# Altium PCB STM32C8T6.PcbDoc
Units mil, origin at the board's own origin, x right, y up, seen from the top; angles counter-clockwise.
Board outline 3865.24 x 3866.42 mil, 2 copper layers (Top Layer, Bottom Layer); 70 components, 62 nets, 378 pads, 47 vias.
Unrouted connection lines stored in the file: 3.
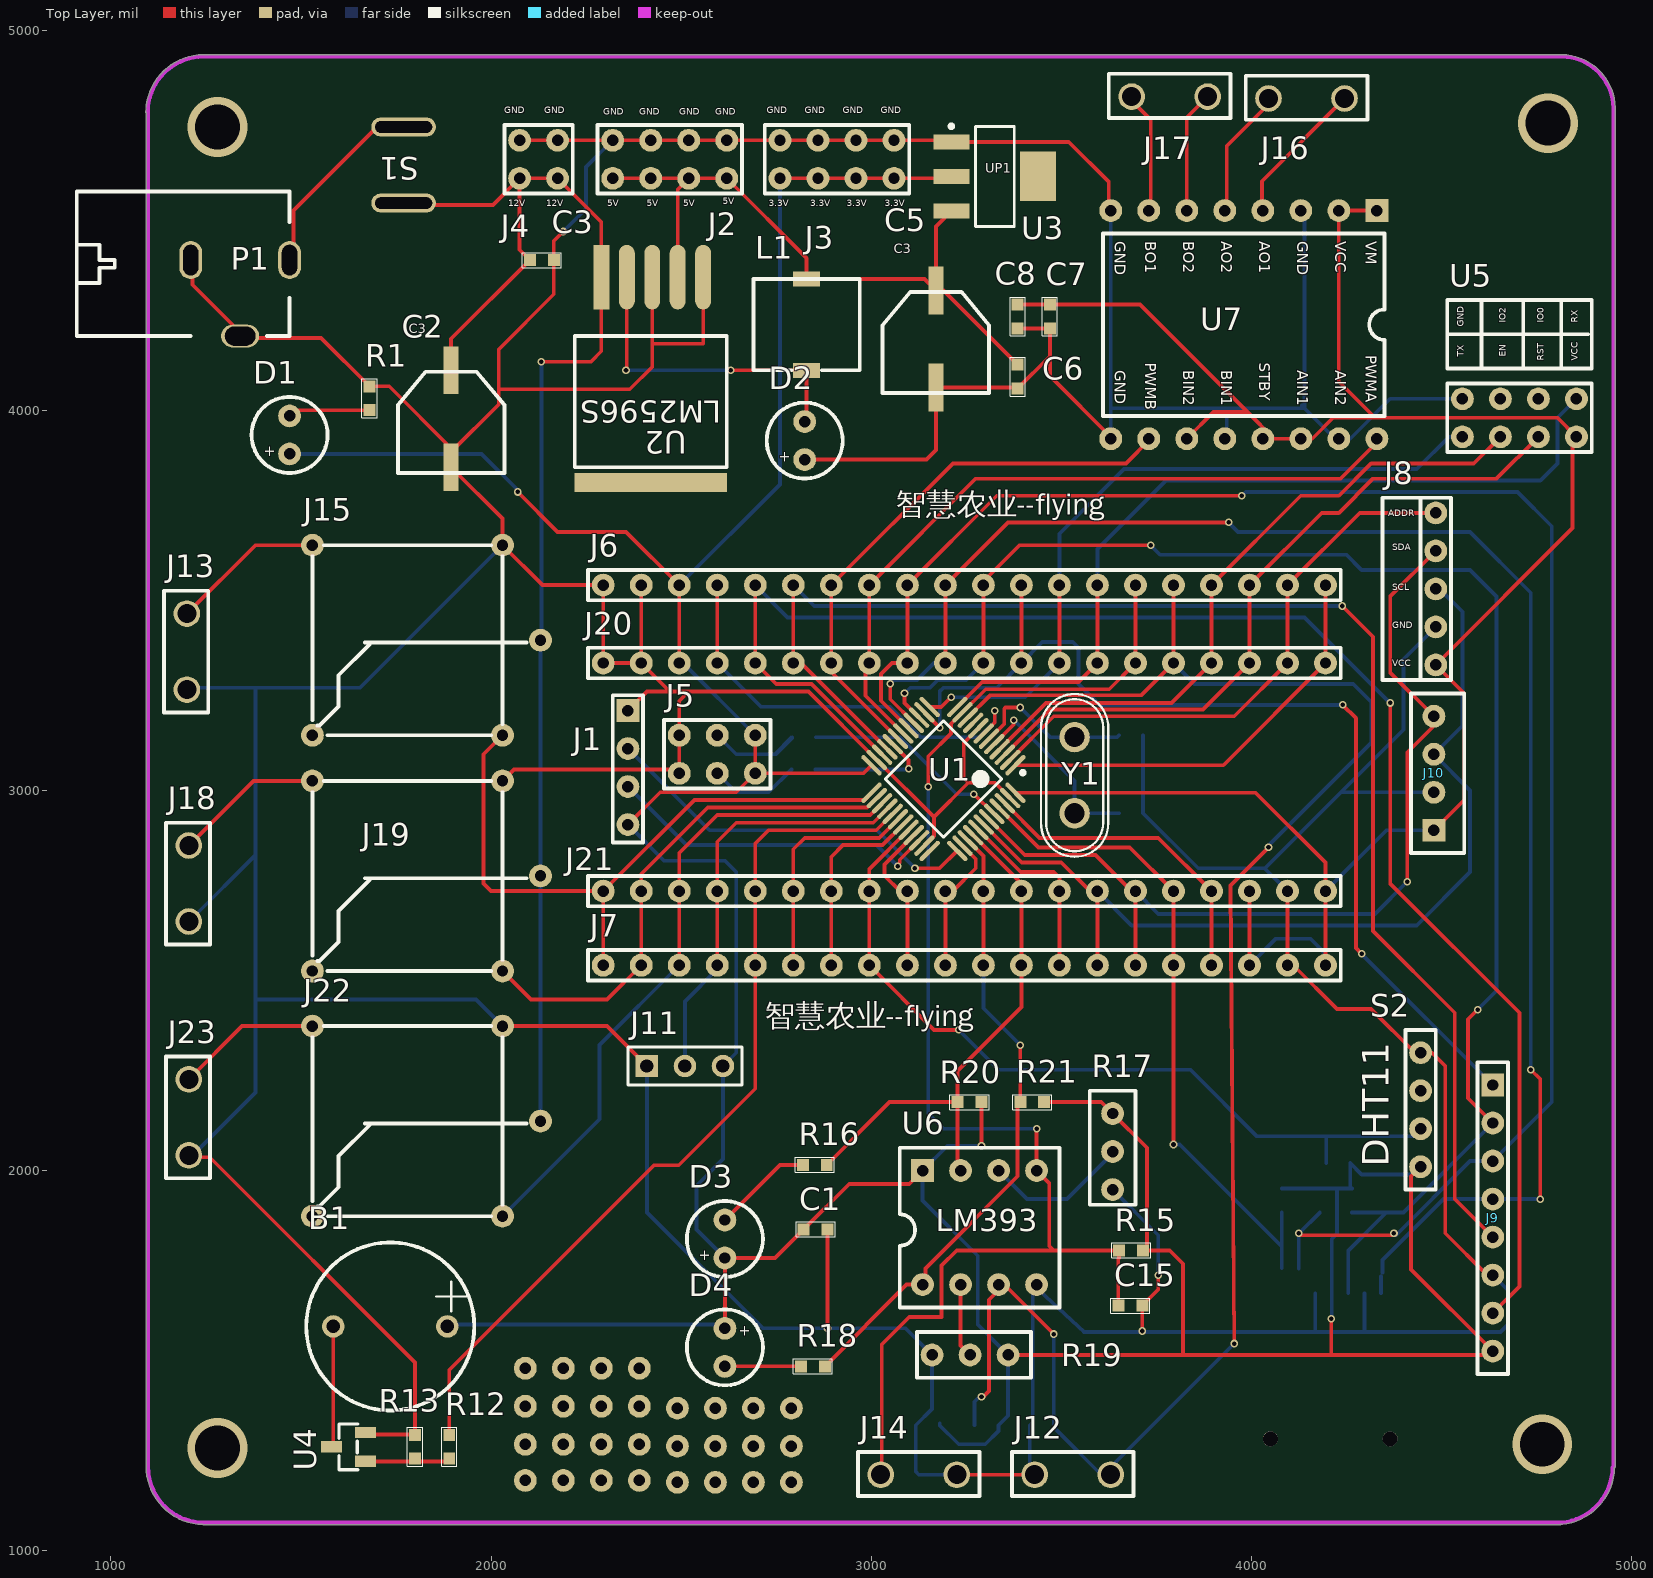
[diagram p0: Top Layer view]
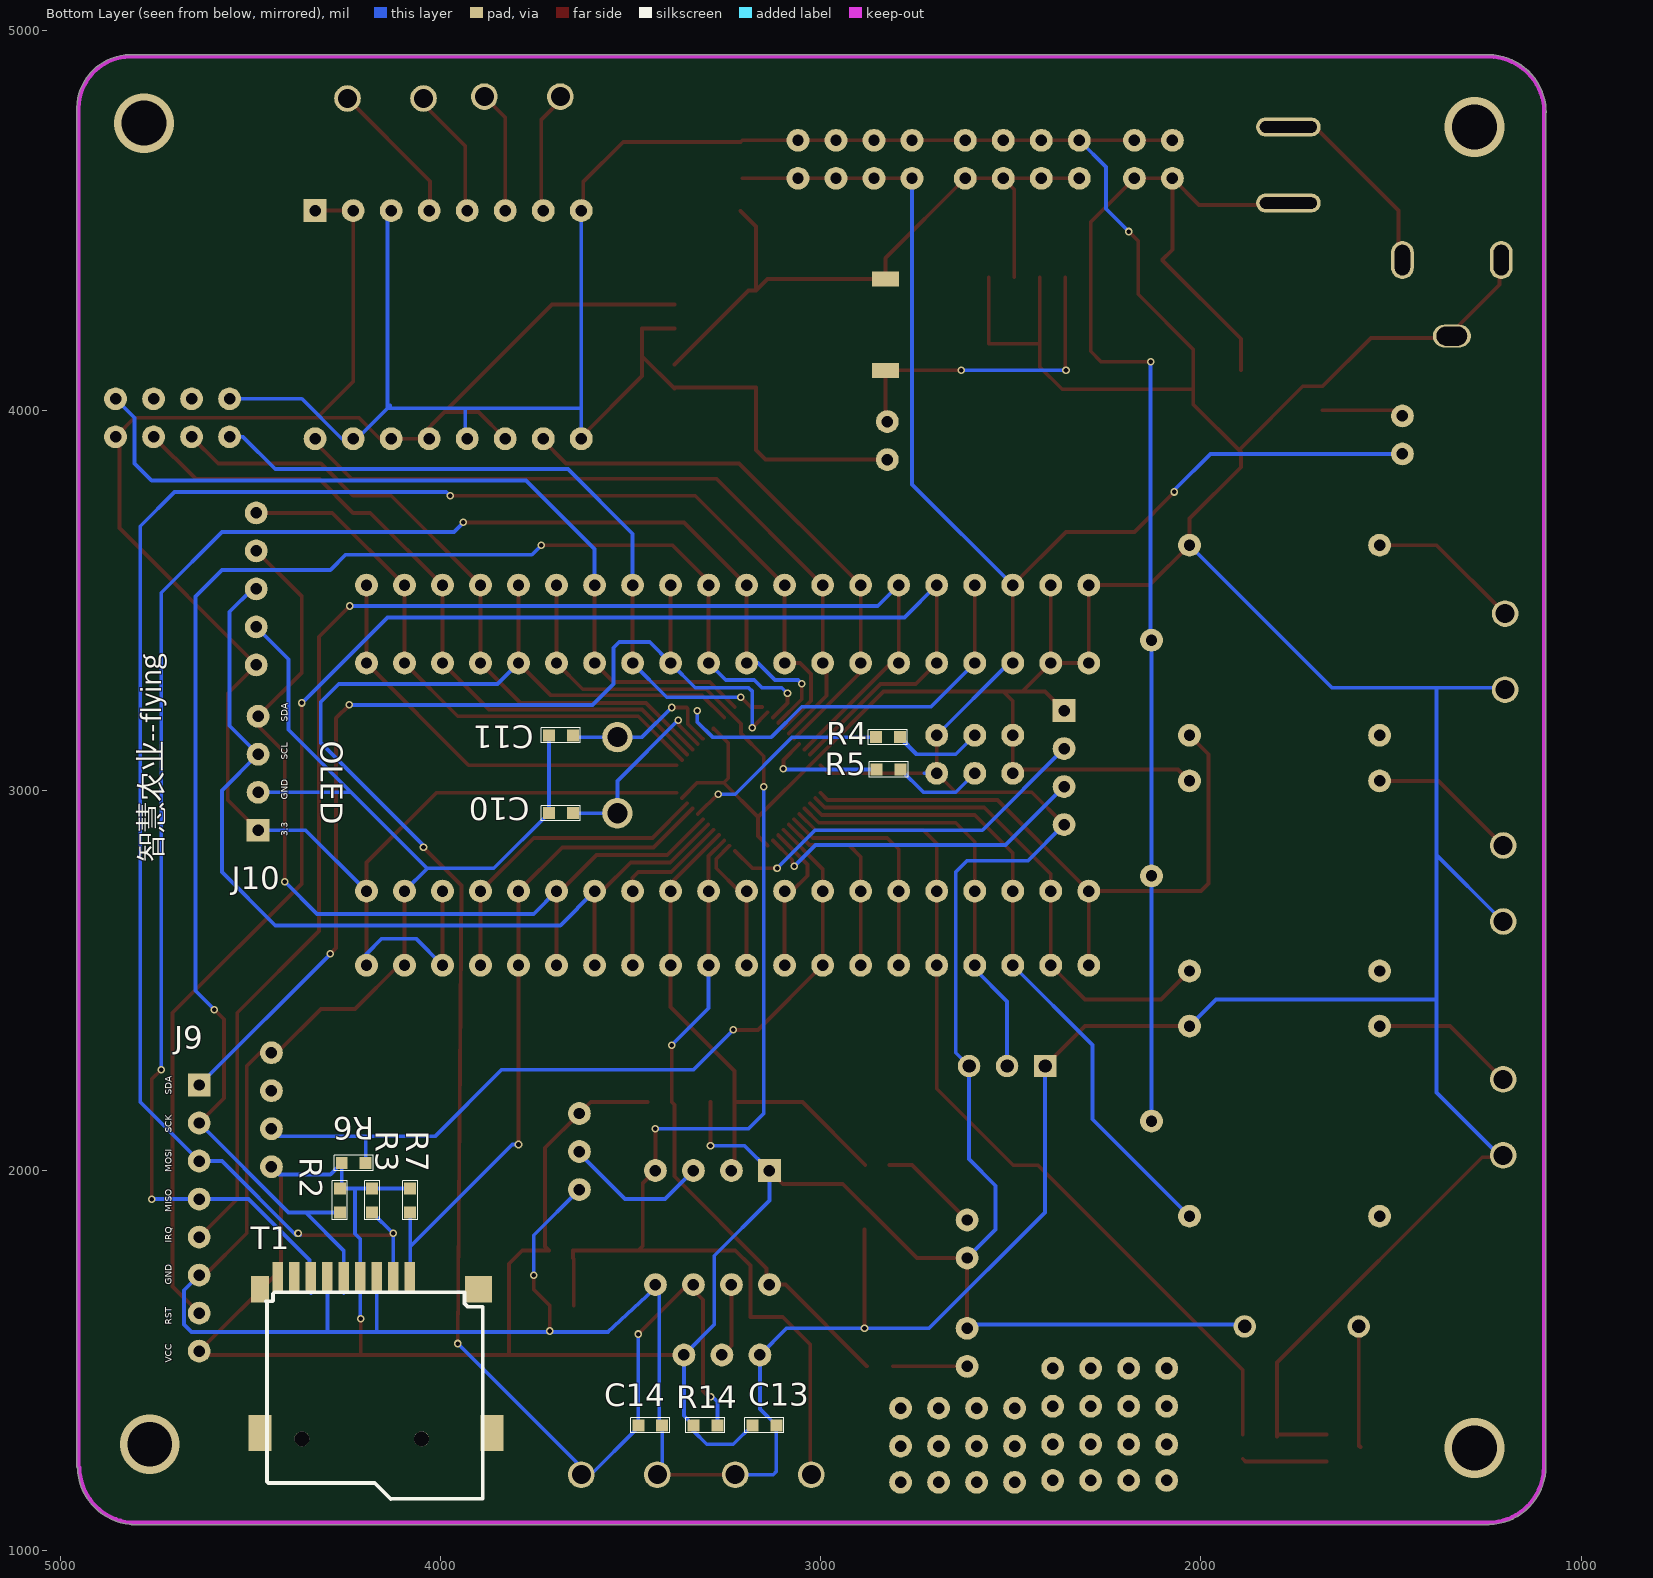
[diagram p1: Bottom Layer view, seen from below]

## Layer stack, top to bottom
Top Solder: solder mask 0.4, Solder Resist, Dk 3.5
Top Layer: signal copper 1.4
Dielectric 1: dielectric 12.6, FR-4, Dk 4.8
Bottom Layer: signal copper 1.4
Bottom Solder: solder mask 0.4, Solder Resist, Dk 3.5

## Board outline
1093.29,1209.33 cw(c1098.09,1210.79) 1093.07,1210.79 1093.07,1212.39 cw(c1245.5,1221.67) 1092.81,1219.39 cw(c1097.82,1219.47) 1093.07,1221.08 1093.07,4781.92 cw(c1097.01,4785.02) 1092,4785.1 cw(c1244.68,4782.52) 1093.07,4800.77 1093.07,4801.91 cw(c1098.09,4801.91) 1093.48,4803.9 cw(c1244.68,4782.52) 1242.41,4935.21 cw(c1242.48,4930.2) 1243.37,4935.13 4814.56,4935.13 cw(c4814.56,4930.12) 4815.76,4934.98 cw(c4816.88,4930.1) 4816.97,4935.11 cw(c4814.56,4792.6) 4957.05,4795.95 cw(c4952.22,4794.6) 4957.24,4794.6 4957.24,1222.21 cw(c4952.22,1222.21) 4954.98,1218.02 cw(c4802.32,1221.48) 4815.96,1069.38 cw(c4814,1074) 4814,1068.98 4810.37,1068.98 cw(c4802.32,1221.48) 4804.59,1068.79 cw(c4804.52,1073.8) 4803.13,1068.98 1242,1068.98 cw(c1242,1074) 1241.42,1069.02 cw(c1245.5,1221.67)

## Design rules (kind name [scope] priority, off if disabled: settings)
Clearance [All] p1: gap=5
DiffPairsRouting [All] p1: maxlimit=5 minlimit=2 mostfreqgap=2 toplayer_minwidth=1 toplayer_maxwidth=5 toplayer_prefwidth=3 bottomlayer_minwidth=1 bottomlayer_maxwidth=5 bottomlayer_prefwidth=3 maxuncoupledlength=500
PolygonConnect [All] p1: connectstyle=Relief reliefconductorwidth=10 reliefentries=4 polygonreliefangle="90 Angle" airgapwidth=10
RoutingVias [All] p1: holewidth=5 width=10 viastyle="Through Hole" minholewidth=3 minwidth=5 maxholewidth=8 maxwidth=15
SolderMaskExpansion [All] p1: expansion=4
Width [All] p1: maxlimit=12 minlimit=5 preferedwidth=10 minimp=50.000000 maximp=50.000000 favimp=50.000000
28 further rules are at their usual default settings.

## Classes and differential pairs
component class Sheet1: B1 C1 C2 C3 C5 C6 C7 C8 C10 C11 D1 D2 J1 J2 J3 J4 J5 J6 J7 J20 J21 L1 P1 R1 R2 R3 R4 R5 R6 R7 R12 R13 S1 S2 T1 U1 U2 U3 U4 Y1
component class Sheet2: C13 C14 C15 D3 D4 J8 J9 J10 J11 J12 J13 J14 J15 J16 J17 J18 J19 J22 J23 R14 R15 R16 R17 R18 R19 R20 R21 U5 U6 U7

## Components (designator, comment, footprint, x,y, rotation, side; value= is the part's Value field where it differs from the comment)
B1 "BEEP" BEEP-9.5X5.5 1785,1590 r180 top
C1 "104" CAP_0603_FIRE 2885,1845 r180 top
C2 "220UF35V" CAP+_47UF_FIRE 1895,3995 r0 top
C3 "0.1UF" CAP_0603_FIRE 2165,4395 r180 top
C5 "220UF35V" CAP+_47UF_FIRE 3170,4205 r0 top
C6 "0.1UF" CAP_0603_FIRE 3385,4120 r270 top
C7 "22UF" CAP_0603_FIRE 3470,4215 r90 top
C8 "0.1UF" CAP_0603_FIRE 3385,4215 r90 top
C10 "20P" CAP_0603_FIRE 3715,2940 r180 bottom
C11 "20P" CAP_0603_FIRE 3715,3145 r180 bottom
C13 "104" CAP_0603_FIRE 3180,1330 r180 bottom
C14 "104" CAP_0603_FIRE 3417.01,1330 r0 bottom
C15 "104" CAP_0603_FIRE 3650,1645 r0 top
D1 "LED" LED_Z 1470,3885 r90 top
D2 "ES2D" LED_Z 2825,3870 r90 top
D3 "LED" LED_Z 2615,1770 r90 top
D4 "LED" LED_Z 2615,1585 r270 top
J1 "SWD" SWD 2360,3210 r0 top
J2 "5V" 5V 2320,4610 r90 top
J3 "3.3V" 3.3V 2760,4610 r90 top
J4 "12V" 12V 2075,4610 r90 top
J5 "BOOT" BOOT 2695,3145 r270 top
J6 "Hander_20" Hander_20 4195,3540 r270 top
J7 "Hander_20" Hander_20 4195,2540 r270 top
J8 "GY-302" GY 4485,3330 r180 top
J9 "RFID" RFID 4635,2225 r270 top
J10 "OLED" OLED 4480,2895 r90 top
J11 "HC-SR501" HDR1X3 2410,2275 r0 top
J12 "K1" port_2 3630,1200 r180 top
J13 "电磁阀" port_2 1200,3465 r270 top
J14 "Port" port_2 3225,1200 r180 top
J15 "relay" relay 1530,3145 r90 top
J16 "电机" port_2 4245,4820 r180 top
J17 "电机" port_2 3885,4825 r180 top
J18 "电磁阀" port_2 1205,2855 r270 top
J19 "relay" relay 1530,2525 r90 top
J20 "Hander_20" Hander_20 4195,3335 r270 top
J21 "Hander_20" Hander_20 4195,2735 r270 top
J22 "relay" relay 1530,1880 r90 top
J23 "电磁阀" port_2 1205,2240 r270 top
L1 "L" L 2830,4105 r180 top
P1 "Power" POWER 1310,4195 r90 top
R1 "1.5K" R_0603 1680,4000 r90 top
R2 "47K" R_0603 4265,1890 r90 bottom
R3 "47K" R_0603 4180,1890 r90 bottom
R4 "10K" R_0603 2855,3140 r180 bottom
R5 "10K" R_0603 2790,3055 r0 bottom
R6 "RES" R_0603 4260,2020 r180 bottom
R7 "47K" R_0603 4080,1890 r90 bottom
R12 "1K" R_0603 1890,1305 r270 top
R13 "10K" R_0603 1800,1305 r270 top
R14 "10K" R_0603 3272,1330 r0 bottom
R15 "10K" R_0603 3715,1790 r180 top
R16 "1k" R_0603 2820,2015 r0 top
R17 "103" RES_R 3635,1950 r180 top
R18 "1k" R_0603 2815,1485 r0 top
R19 "103" RES_R 3160,1515 r90 top
R20 "10K" R_0603 3290,2180 r180 top
R21 "10K" R_0603 3455,2180 r180 top
S1 "" SWITCH 1770,4745 r270 top
S2 "DHT11" DHT11 4445,2010 r90 top
T1 "TF" TF_CARD 4475,1310 r180 bottom
U1 "stm32c8t6" LQFP48_N 3190,3030 r225 top
U2 "LM2596" LM2596 2290,4350 r90 top
U3 "AMS1117" AMS-1117-3.3 3325,4615 r0 top
U4 "9014" SOT-23 1670,1235 r90 top
U5 "ESP8266" ESP8266 4555,3930 r90 top
U6 "LM393" LM393 3135,1700 r90 top
U7 "TB6612" TB6612 4330,4525 r270 top
Y1 "8MHZ" XTAL_socket 3535,3040 r90 top

## Footprints (in the part's own frame and the unit in brackets; to place one, negate y for a bottom-side part, rotate by r counter-clockwise, add the part's x,y. Pads: shape width x height; smd on the part's side, far side on the other; paste and mask are expansions set on the pad)
3.3V [mil]
  round 60 hole 30: 1(0,0) 2(0,-100) 3(0,-200) 4(0,-300) 5(100,-300) 6(100,-200) 7(100,-100) 8(100,0)
  silkscreen extent -40,-340 140,40
5V [mil]
  round 60 hole 30: 1(0,0) 2(0,-100) 3(0,-200) 4(0,-300) 5(100,0) 6(100,-100) 7(100,-200) 8(100,-300)
  silkscreen extent -40,-340 140,40
12V [mil]
  round 60 hole 30: 1(0,0) 2(0,-100) 3(100,0) 4(100,-100)
  silkscreen extent -40,-140 140,40
AMS-1117-3.3 [mm]
  rect 2.4x1 smd: 1(-2.9,2.3) 2(-2.9,0) 3(-2.9,-2.3)
  rect 2.4x3.3 smd: 4(2.9,0)
  silkscreen extent -3.02,-3.35 1.3,3.47
BEEP-9.5X5.5 [mm]
  round 1.5 hole 0.9: 1(-2.54,0) 2(5.08,0)
  silkscreen extent -4.34,-5.61 6.88,5.61
BOOT [mil]
  round 60 hole 30: 1(0,0) 2(0,-100) 3(0,-200) 4(100,-200) 5(100,-100) 6(100,0)
  silkscreen extent -40,-240 140,40
CAP+_47UF_FIRE [mm]
  rect 1x3.2 smd: 1(0,2.8) 2(0,-3.683)
  silkscreen extent -3.56,-4.06 3.56,2.7
CAP_0603_FIRE [mm]
  rect 0.8x0.8 smd: 1(0,0) 2(1.6,0)
  silkscreen extent -0.5,-0.5 2.1,0.5
DHT11 [mil]
  round 60 hole 30: 1(0,0) 2(100,0) 3(200,0) 4(300,0)
  silkscreen extent -60,-40 360,40
ESP8266 [mil]
  round 60 hole 30: 1(0,-300) 2(0,-200) 3(0,-100) 4(0,0) 5(100,-300) 6(100,-200) 7(100,-100) 8(100,0)
  silkscreen extent -40,-340 360,40
GY [mil]
  round 60 hole 30: 1(0,0) 2(0,-100) 3(0,-200) 4(0,-300) 5(0,-400)
  silkscreen extent -40,-440 140,40
Hander_20 [mil]
  round 60 hole 30: 1(0,0) 2(0,-100) 3(0,-200) 4(0,-300) 5(0,-400) 6(0,-500) 7(0,-600) 8(0,-700) 9(0,-800) 10(0,-900) 11(0,-1000) 12(0,-1100) 13(0,-1200) 14(0,-1300) 15(0,-1400) 16(0,-1500) 17(0,-1600) 18(0,-1700) 19(0,-1800) 20(0,-1900)
  silkscreen extent -40,-1940 40,40
HDR1X3 [mm] "Connector; Header; 3 Position"
  rect 1.5x1.5 hole 0.9: 1(0,0)
  round 1.5 hole 0.9: 2(2.54,0) 3(5.08,0)
  silkscreen extent -1.27,-1.27 6.35,1.27
L [mm]
  rect 1.8x1 all layers, no hole: 1(0,0) 2(0,-6.096)
  silkscreen extent -3.56,-6.1 3.56,0
LED_Z [mil]
  round 60 hole 30: 1(0,0) 2(100,0)
  silkscreen extent -50,-100 150,100
LM393 [mil]
  round 60 hole 30: 1(0,0) 2(0,-100) 3(0,-200) 4(0,-300) 5(300,-300) 6(300,-200) 7(300,-100)
  rect 60x60 hole 30: 8(300,0)
  silkscreen extent -60,-360 360,60
LM2596 [mil]
  rect 170x42 smd: 1(0,0)
  oval 170x42 smd: 2(0,-67) 3(0,-134) 4(0,-201) 5(0,-268)
  rect 50x400 smd: 6(-540,-130)
  silkscreen extent -500,-330 -155,70
LQFP48_N [mm]
  oval 1.8x0.3 smd: 1(-4.05,2.75) 2(-4.05,2.25) 3(-4.05,1.75) 4(-4.05,1.25) 5(-4.05,0.75) 6(-4.05,0.25) 7(-4.05,-0.25) 8(-4.05,-0.75) 9(-4.05,-1.25) 10(-4.05,-1.75) 11(-4.05,-2.25) 12(-4.05,-2.75) 25(4.05,-2.75) 26(4.05,-2.25) 27(4.05,-1.75) 28(4.05,-1.25) 29(4.05,-0.75) 30(4.05,-0.25) 31(4.05,0.25) 32(4.05,0.75) 33(4.05,1.25) 34(4.05,1.75) 35(4.05,2.25) 36(4.05,2.75)
  oval 0.3x1.8 smd: 13(-2.75,-4.05) 14(-2.25,-4.05) 15(-1.75,-4.05) 16(-1.25,-4.05) 17(-0.75,-4.05) 18(-0.25,-4.05) 19(0.25,-4.05) 20(0.75,-4.05) 21(1.25,-4.05) 22(1.75,-4.05) 23(2.25,-4.05) 24(2.75,-4.05) 37(2.75,4.05) 38(2.25,4.05) 39(1.75,4.05) 40(1.25,4.05) 41(0.75,4.05) 42(0.25,4.05) 43(-0.25,4.05) 44(-0.75,4.05) 45(-1.25,4.05) 46(-1.75,4.05) 47(-2.25,4.05) 48(-2.75,4.05)
  silkscreen extent -4.17,-2.75 2.75,3.57
OLED [mil]
  rect 60x60 hole 30: 1(0,0)
  round 60 hole 30: 2(100,0) 3(200,0) 4(300,0)
  silkscreen extent -60,-80 360,60
port_2 [mil]
  round 70 hole 50: 1(0,0) 2(200,0)
  silkscreen extent -60,-60 260,56
POWER [mil]
  oval 100x60 hole 40 slot 80 at 0 deg: 1(200,100) 3(200,-160)
  oval 60x100 hole 50 slot 80 at 90 deg: 2(0,-30)
  silkscreen extent 0,-160 380,400
R_0603 [mm]
  rect 0.8x0.8 smd: 1(0,0) 2(1.6,0)
  silkscreen extent -0.51,-0.51 2.11,0.51
relay [mil]
  round 60 hole 30: 1(0,0) 2(0,-500) 3(250,-600) 4(500,-500) 5(500,0)
  silkscreen extent 0,-564 500,0
RES_R [mil]
  round 60 hole 30: 1(0,0) 2(0,-200) 3(0,-100)
  silkscreen extent -60,-260 60,40
RFID [mil]
  rect 60x60 hole 30: 1(0,0)
  round 60 hole 30: 2(100,0) 3(200,0) 4(300,0) 5(400,0) 6(500,0) 7(600,0) 8(700,0)
  silkscreen extent -60,-40 760,40
SOT-23 [mil]
  rect 30x55 smd: 1(0,0) 2(76,0) 3(38,90)
  silkscreen extent -22,20 98,70
SWD [mil]
  rect 60x60 hole 30: 1(0,0)
  round 60 hole 30: 2(0,-100) 3(0,-200) 4(0,-300)
  silkscreen extent -40,-347 40,40
SWITCH [mil]
  oval 50x170 hole 30 slot 150 at 90 deg: 1(0,0) 2(200,0)
TB6612 [mil]
  rect 60x60 hole 30: 1(0,0)
  round 60 hole 30: 2(0,-100) 3(0,-200) 4(0,-300) 5(0,-400) 6(0,-500) 7(0,-600) 8(0,-700) 9(600,0) 10(600,-100) 11(600,-200) 12(600,-300) 13(600,-400) 14(600,-500) 15(600,-600) 16(600,-700)
  silkscreen extent 60,-720 540,20
TF_CARD [mm]
  rect 0.7x2.1 smd: 1(10,10.35) 2(8.9,10.35) 3(7.8,10.35) 4(6.7,10.35) 5(5.6,10.35) 6(4.5,10.35) 7(3.4,10.35) 8(2.3,10.35) 9(1.2,10.35)
  rect 1.2x1.778 smd: 10(0,9.6)
  rect 1.524x2.413 smd: 11(0,0) 12(15.5,0)
  rrect0% 1.778x1.778 smd: 13(14.6,9.6)
  round 1 hole 1: 14(10.8,-0.4) 15(2.8,-0.4)
  silkscreen extent 0.41,-4.42 14.88,9.4
XTAL_socket [mil]
  round 80 hole 53: 1(100,0) 2(-100,0)
  silkscreen extent -215,-89 214,89

## Part data
C1 C3 C6 C7 C8 C10 C11 C13 C14 C15: library part Capacitance
C2 C5: library part Capactiance+
D2: library part LED
J12 J13 J16 J17 J18 J23: library part port_2
R1 R2 R3 R4 R5 R7 R12 R13 R14 R15 R16 R18 R20 R21: library part RES
R17 R19: library part RES_R
S1: library part Switch
Y1: library part XTAL

## Free pads (board coordinates)
  round 60 hole 30: 0(2090,1185) 0(2090,1280) 0(2090,1380) 0(2090,1480) 0(2490,1180) 0(2490,1275) 0(2490,1375) 2(2190,1185) 2(2190,1280) 2(2190,1380) 2(2190,1480) 2(2590,1180) 2(2590,1275) 2(2590,1375) 3(2290,1185) 3(2290,1280) 3(2290,1380) 3(2290,1480) 3(2690,1180) 3(2690,1275) 3(2690,1375) 4(2390,1185) 4(2390,1280) 4(2390,1380) 4(2390,1480) 4(2790,1180) 4(2790,1275) 4(2790,1375)

## Via types
v1: diameter 20, hole 12, Top Layer to Bottom Layer, 43 vias
v2: diameter 157.48, hole 118.11, Top Layer to Bottom Layer, 4 vias

## Nets (pads, with @x,y where several pads share a name; then routed paths per layer and width w, separated by ;. In a path a pad name is that pad's centre, name@x,y a point inside that pad or via, vN(x,y) a via of type N, cw(c..) or ccw(c..) an arc to the next point about the centre after c; other vN are vias at no path point)
3.3V: B1.1 C1.2 C7.2 C8.2 C13.1 D1.1 D3.1 D4.1 J1.4 J3.1 J3.2 J3.3 J3.4 J5.1 J5.6 J6.18 J7.1 J7.3 J8.1 J9.8 J10.1 J11.3 J20.18 J21.1 J21.3 R2.2 R3.2 R6.1 R7.2 R14.2 R15.1 R17.2 R19.2 R20.1 R21.1 S2.1 T1.4 U1.9 U1.24 U1.36 U1.48 U3.2 U5.1 U6.8 U7.1 U7.2 U7.11 U7.12 U7.14 | length 17842.1
  Top Layer w10: v1(2070,3785) 2175,3680 2355,3680 J6.18 J20.18 ; J1.4 2445,2995 2645,2995 J5.6 ; D4.1 D3.1 2747.01,1770 C1.2 2942.01,1965 3100,1965 U6.8 ; J5.1 J5.6 ; J3.1 J3.2 J3.3 J3.4 U3.2@3205.83,4610 ; U1.24 2979.51,3045 J5.6 ; v1(3290,2065) R20.1 ; R19.2 3820,1515 ; U1.48 4011.19,2993.81 4195,2810 J21.1 J7.1 ; C8.2 C7.2 3707.01,4277.99 3990,3995 ; R21.1 3605,2180 R17.2 3725,2060 3725,1800 R15.1 3785,1790 3820,1755 3820,1515 ; U7.14 3900,3995 3990,3995 ; J7.3 J21.3 ; 4210,1520 v1(4210,1610) ; U7.1 U7.2 4230,4075 4325,3980 ; S2.1 4420,1985 4420,1740 J9.8 ; J10.1 4560,2975 4560,3255 J8.1 4845,3690 U5.1@4845,3930 ; J9.8@4625,1515 3820,1515 ; U5.1 4805,3980 4325,3980 ; 3990,3995 4060,3925 4160,3925 4215,3980 4325,3980
  Bottom Layer w10: D1.1 1975,3885 2067.5,3792.5 2067.5,3787.5 v1(2070,3785) ; B1.1@1870,1595 2605,1595 D4.1 ; J1.4 2455,2815 2615,2815 2645,2785 2645,2310 J11.3 2610,2030 2540,1960 2540,1845 D3.1 ; J20.18 2505,3335 J5.1 ; J6.18 2760,3805 J3.1@2760,4600 ; J5.6 2728,3045 ; C13.1@3180,1335 C13.1 3230,1280 3300,1280 3334.99,1314.99 R14.2 3360,1355.01 R19.2 3280,1595 3280,1776 3135,1921 U6.8 3200,2065 v1(3290,2065) ; J7.3 4065,2610 4155,2610 4195,2570 J7.1 ; R7.2 R3.2 4225,1952.99 ; J21.1 4355,2895 J10.1 ; v1@4211.22,1606.22 4211.22,1820 4225,1833.78 4225,1952.99 ; R2.2@4260,1957.99 R6.1 4290,1990 4425,1990 S2.1 ; R2.2 4225,1952.99 ; J9.8@4625,1515 J9.8
5V: C5.1 C6.1 J2.1 J2.2 J2.3 J2.4 L1.2 U2.4 U3.3 | length 1798.3
  Top Layer w10: J2.1 J2.2 J2.3 ; U2.4 2491,4581 J2.3 ; U3.3 3170,4483.62 C5.1 ; C6.1 3189.76,4315.24 C5.1 ; J2.3 J2.4 2830,4400 L1.2 3140.24,4345 C5.1
12V: C2.1 C3.2 J4.1 J4.2 J15.3 J19.3 J22.3 S1.2 U2.1 | length 3709.9
  Top Layer w10: S1.2@1770,4530 1780,4540 2005,4540 J4.1 ; C2.1 1895,4187.99 C3.2 2075,4422.01 J4.1 ; v1(2132.5,4127.5) 2262.5,4127.5 2290,4155 U2.1 2290,4495 J4.2 J4.1
  Bottom Layer w10: J22.3 J19.3 J15.3 2132.5,3397.5 v1(2132.5,4127.5)
BEEP: J7.16 J21.16 R12.1 U1.29 | length 2320.3
  Top Layer w10: R12.1 1890,1475 2428.75,2013.75 2493.75,2013.75 2695,2215 J7.16 J21.16 2695,2860 2730,2895 3013.24,2895 U1.29
BOOT0: R4.1 U1.44 | length 551.7
  Top Layer w10: v1(3270,2990) U1.44
  Bottom Layer w10: R4.1 3075,3140 3225,2990 v1(3270,2990)
BOOT1: R5.2 U1.20 | length 328.4
  Top Layer w10: U1.20 3098.24,3080 v1(3098.24,3056.76)
  Bottom Layer w10: R5.2 3096.48,3055 v1(3098.24,3056.76)
FIRE_IN: C15.1 J6.6 J14.2 J20.6 R15.2 U1.11 U6.5 | length 3741.7
  Top Layer w10: J14.2 3027.5,1202.5 3027.5,1542.5 3100,1615 3185,1615 3185,1750 3225,1790 R15.2 3652.01,1770.01 3650,1768 C15.1 ; v1(3150,3010) 3150,3090 3210,3150 3210,3175.27 U1.11 ; U1.11@3240.38,3205.38 3301.22,3266.22 3626.22,3266.22 J20.6 J6.6 ; v1(3435,2110) U6.5 3468,1967 3468,1802 3480,1790
  Bottom Layer w10: v1(3150,3010) 3150,2150 3190,2110 v1(3435,2110)
FIRE_IN2: R17.3 U6.6 | length 385.8
  Bottom Layer w10: U6.6 3410,1925 3515,1925 3635,2045 R17.3
FIRE_OUT: J7.9 J21.9 R16.2 R20.2 U1.40 U6.7 | length 1420.3
  Top Layer w10: R16.2 3047.99,2180 R20.2 ; U6.7 3227.01,2007.99 R20.2 ; U1.40 3395,2755.4 J21.9 J7.9 3395,2430 3227.01,2262.01 R20.2
GND: C1.1 C2.2 C3.1 C5.2 C6.2 C7.1 C8.1 C10.1 C11.1 C13.2 C14.1 C15.2 D2.1 J1.1 J2.5 J2.6 J2.7 J2.8 J3.5 J3.6 J3.7 J3.8 J4.3 J4.4 J5.3 J5.4 J6.19 J6.20 J7.2 J8.2 J9.6 J10.2 J11.1 J12.2 J13.2 J14.1 J15.4 J18.2 J19.4 J20.19 J20.20 J21.2 J22.4 J23.2 P1.1 P1.2 R1.2 R13.1 R17.1 R19.1 S2.4 T1.3 T1.6 U1.8 U1.23 U1.35 U1.47 U2.3 U2.5 U3.1 U4.2 U5.8 U6.4 U7.3 U7.8 U7.10 U7.13 U7.16 | length 24302.7
  Top Layer w10: P1.1@1215,4420 1215,4330 P1.2@1360,4185 ; J23.2@1220,2035 1260,2035 1800,1495 R13.1@1800,1300 ; P1.2@1350,4190 1552.99,4190 R1.2 1732.01,4062.99 C2.2@1895,3900 ; U4.2@1670,1306 R13.1@1800,1306 ; 2025,4055 2365,4055 2424,4114 2424,4175 ; J22.4 2305,2380 J11.1 ; J19.4 2060,3055 2485,3055 J5.4 J5.3 2495,3235 2520,3260 ; J4.3 J4.4 J2.5 J2.6 J2.7 J2.8 J3.8 J3.7 J3.6 J3.5 U3.1@3206.38,4710 ; v1(2190,4470) 2165,4445 C3.1 2165,4305 2020,4160 2020,4015 1895,3890 C2.2 2030,3715 J15.4 2135,3540 J6.20 J20.20 J20.19 ; J1.1 2410,3260 2470,3260 ; J6.19 J20.19 ; U2.3 2424,4175 ; U2.5 2558,4175 2424,4175 ; D2.1 3145,3870 3170,3895 C5.2 3385,4060 C6.2 3470,4142.01 C7.1 ; v1(2885,1585) C1.1 ; U1.35 3165,2879.73 3165,2929.73 ; U3.1 3519.45,4705.55 3625,4600 U7.8@3625,4540 ; J14.1@3212.01,1200 J14.1 J12.2 J12.2@3460,1200 ; U1.8@3281.87,3161.87 U1.8 3243.24,3125 3243.24,3032.03 3255.27,3020 ; U1.47 3325.27,3020 3255.27,3020 ; C8.1 C7.1 ; U7.16@3635,3925 3470,4090 C7.1 ; v1(3712.99,1577.99) C15.2 3755,1687.01 v1(3755,1725) ; J21.2 J7.2 4110,2540 4225,2425 4315,2425 4430,2310 4475,2310 4510,2275 4510,1835 4620,1725 J9.6 ; J20.19 2470,3260 ; 2470,3260 2520,3260 ; 2520,3260 2834.73,3260 U1.23 3165,2929.73 ; 3165,2929.73 3255.27,3020
  Bottom Layer w10: J13.2 1205,3270 1380,3270 ; J23.2@1205,2030 1380,2205 1380,2830 ; J18.2@1212.5,2662.5 1380,2830 ; 1385,2450 1960,2450 J22.4 ; J15.4 1655,3270 1380,3270 ; v1(2190,4470) 2250,4530 2250,4640 J2.5 ; J11.1 2410,1890 2715,1585 v1(2885,1585) 3090,1585 R19.1 3160,1372.99 C13.2 3117.01,1207.99 3125,1200 J14.1 ; J12.2 3417.01,1212.99 C14.1 3425,1337.99 3425,1700 3560,1575 4655,1575 4675,1595 4675,1685 J9.6 ; U7.16 3630,4005 ; U7.8 3630,4005 ; R17.1 3755,1830 v1(3755,1725) ; C11.1 C10.1 3860,2795 4035,2795 4035.27,2794.73 J21.2 ; U7.13@3935,3925 3935,4005 ; J21.2@4095,2745 J21.2 ; 4132.5,4012.5 4220,3925 4260,3925 4365,4030 U5.8 ; U7.3@4140,4505 4140,4005 3935,4005 ; 4167.91,1577.09 T1.3@4167.91,1677.48 ; 4297.83,1577.17 T1.6@4297.83,1677.48 ; J10.2 4235.55,2995 ; J8.2 4400,3345 4400,3159.45 4235.55,2995 ; 1380,2830 1380,3270 ; 3630,4005 3935,4005 ; J21.2 4035.28,2794.73 4235.55,2995
GY_INT: J7.4 J21.4 U1.46 | length 834.2
  Top Layer w10: U1.46 3442.44,2875 3755,2875 J21.4 J7.4
I2C_SCL: J7.7 J8.3 J10.3 J21.7 U1.42 | length 2492.4
  Top Layer w10: U1.42 3396.08,2810 3500,2810 3575,2735 J21.7 J7.7
  Bottom Layer w10: J21.7 3685,2645 4435,2645 4575,2785 4575,3000 J10.3 4555,3170 4555,3460 4555,3470 4495,3530 J8.3
I2C_SDA: J7.6 J8.4 J10.4 J21.6 U1.43 | length 2430.1
  Top Layer w10: U1.43 3403.92,2830 3590,2830 3685,2735 J21.6 J7.6 ; v1(4410,2760) 4410,3100 4480,3170 J10.4 4365,3310 4365,3510 J8.4
  Bottom Layer w10: J21.6 3755,2675 4325,2675 v1(4410,2760)
NetB1_2: B1.2 U4.3 | length 322.1
  Top Layer w10: U4.3 U4.3@1585,1278 ; U4.3@1585,1275 B1.2
NetD1_2: D1.2 R1.1 | length 216.2
  Top Layer w10: D1.2 1485,4000 R1.1
NetD2_2: D2.2 L1.1 U2.2 | length 855.1
  Top Layer w10: v1@2357,4107 U2.2 ; v1(2630,4105) L1.1 2830,3975 D2.2
  Bottom Layer w10: v1(2355,4105) v1(2630,4105)
NetD3_2: D3.2 R16.1 | length 265.1
  Top Layer w10: D3.2 2760,2015 R16.1
NetD4_2: D4.2 R18.1 | length 200
  Top Layer w10: D4.2@2610,1485 R18.1@2810,1485
NetJ5_2: J5.2 R4.2 | length 311.8
  Bottom Layer w10: J5.2@2605,3145 J5.2 2645,3095 2655,3095 2747.01,3095 ; 2747.01,3095 R4.2 2792.01,3137.01 2750,3095 2747.01,3095
NetJ5_5: J5.5 R5.1 | length 250.6
  Bottom Layer w10: J5.5@2605,3045 J5.5 2645,2995 2655,2995 2730,2995 R5.1
NetJ13_1: J13.1 J15.5 | length 404.6
  Top Layer w10: J13.1 1380,3645 J15.5
NetJ16_1: J16.1 U7.4 | length 389.7
  Top Layer w10: U7.4@4027.5,4527.5 4027.5,4602.5 J16.1@4250,4825
NetJ16_2: J16.2 U7.5 | length 340.6
  Top Layer w10: U7.5@3935,4525 3935,4695 4045,4805 J16.2
NetJ17_1: J17.1 U7.6 | length 322.8
  Top Layer w10: U7.6 3830,4770 J17.1
NetJ17_2: J17.2 U7.7 | length 320.7
  Top Layer w10: J17.2 3685,4815 3735,4765 U7.7@3735,4525
NetJ18_1: J18.1 J19.5 | length 395.4
  Top Layer w10: J18.1 1375,3025 J19.5
NetJ22_5: J22.5 J23.1 | length 383
  Top Layer w10: J23.1 1345,2380 J22.5
NetP1_3: P1.3 S1.1 | length 543.2
  Top Layer w10: P1.3@1480,4390 1480,4525 1695,4740 1785,4740 S1.1@1795,4730
NetR12_2: R12.2 R13.2 U4.1 | length 222.9
  Top Layer w10: U4.1 1882.99,1235 R12.2
NRST: J6.17 J20.17 U1.7 | length 1134.7
  Top Layer w10: J20.17 J6.17 ; U1.7 3325,3178.92 v1(3325,3210)
  Bottom Layer w10: J20.17 2710,3220 3050,3220 3130,3140 3285,3140 3325,3180 v1(3325,3210)
OSC_IN: C10.2 U1.5 Y1.2 | length 512.7
  Top Layer w10: U1.5 3375,3173.24 v1(3375,3185)
  Bottom Layer w10: v1(3375,3185) 3535,3025 Y1.2 C10.2
OSC_OUT: C11.2 U1.6 Y1.1 | length 434.2
  Top Layer w10: U1.6 3310.79,3135.79 3350,3175 3350,3215 3353.04,3218.04 v1(3391.96,3218.04)
  Bottom Layer w10: v1(3391.96,3218.04) 3470,3140 Y1.1 3647.01,3140 C11.2
PA0: C14.2 J6.5 J12.1 J20.5 R14.1 U1.10 U6.3 | length 4733.6
  Top Layer w10: U1.10 3312.56,3250 3710,3250 J20.5 J6.5 ; v1@3292.5,1402.5 3310,1420 3310,1660 3335,1685 U6.3 ; U6.3@3350,1700 v1(3480,1570) ; J12.1 J12.1@3640,1190 ; v1(3955,1545) 3945,2750 v1(4045,2850)
  Bottom Layer w10: R14.1 3272,1392 3285,1405 v1@3295,1405 ; C14.2 v1(3480,1570) ; C14.2@3485,1320 3605,1200 J12.1 ; J12.1@3607.5,1197.5 v1(3955,1545) ; J20.5 3850,3280 4268,3280 4315,3233 4315,3125 v1@4045,2855
  other v1: 3290,1405
PA2: J6.7 J20.7 U1.12 U5.5 | length 2210.6
  Top Layer w10: U1.12 3291.89,3285 3545,3285 J20.7 J6.7
  Bottom Layer w10: J6.7 3595,3635 3775,3815 4760,3815 4805,3860 4805,3980 U5.5
PA3: J6.8 J20.8 U1.13 U5.4 | length 1895.2
  Top Layer w10: U1.13 3184.3,3219.3 v1(3210,3245) ; J20.8 J6.8
  Bottom Layer w10: v1@3209.51,3245 v1(3210,3245) 3405,3245 J20.8 ; J6.8 3495,3675 3665,3845 4350,3845 4435,3845 4520,3930 U5.4
PA4: J6.9 J9.1 J20.9 U1.14 | length 2757.9
  Top Layer w10: U1.14 v1(3180,3165.27) ; J20.9 J6.9 ; v1(4240,3225) 4275,3190 4275,2585 v1(4290,2570)
  Bottom Layer w10: v1(3180,3165.27) 3180,3260 3190,3270 3330,3270 J20.9 3450,3390 3530,3390 3545,3375 3545,3280 3600,3225 v1(4240,3225) ; v1(4290,2570) J9.1
PA5: J6.10 J9.2 J20.10 R2.1 T1.5 U1.15 | length 4137.9
  Top Layer w10: v1(3087.44,3255) 3087.44,3230 U1.15 ; J20.10 J6.10 3295,3550 3390,3645 v1(3735,3645) ; v1(4595,2423) 4570,2398 4570,2190 J9.2
  Bottom Layer w10: v1(3087.44,3255) 3102.44,3270 3155,3270 3175,3290 3250,3290 J20.10 ; v1(3735,3645) 3760,3620 4250,3620 4290,3580 4575,3580 4645,3510 4645,2473 v1(4595,2423) ; T1.5@4254.53,1677.48 4254.53,1738 4255,1738.47 4255,1790 4350,1885 ; R2.1 4400,1890 J9.2
PA6: J6.11 J9.4 J20.11 T1.7 U1.16 | length 4349.9
  Top Layer w10: v1(3050,3280) 3050,3239.6 U1.16 ; J20.11 J6.11 3360,3705 v1(3940,3705) ; v1(4735,2265) 4760,2240 v1(4760,1925)
  Bottom Layer w10: v1(3050,3280) 3060,3290 3120,3290 3165,3335 J20.11 ; v1(3940,3705) 3965,3680 4575,3680 4735,3520 v1(4735,2265) ; T1.7@4341.14,1677.48 T1.7@4341.14,1721.14 ; T1.7@4345,1731.34 4345,1765 4505,1925 J9.4 v1(4760,1925)
PA7: J6.12 J9.3 J20.12 R3.1 T1.2 U1.17 | length 4802
  Top Layer w10: U1.17 3026,3235.76 3026,3306 3055,3335 J20.12 J6.12 3330,3775 v1(3975,3775) ; v1@4124.61,1830 4370,1830 v1(4375,1835)
  Bottom Layer w10: v1(3975,3775) 3985,3785 4700,3785 4790,3695 4790,2180 J9.3 4575,2025 4380,1830 4370,1830 v1(4375,1835) ; T1.2@4124.61,1742.48 v1(4124.61,1834.61) R3.1
PA9: J7.15 J21.15 U1.30 | length 613.1
  Top Layer w10: J7.15 J21.15 2795,2845 2825,2875 3021.08,2875 U1.30
PA10: J7.14 J21.14 U1.31 | length 509.5
  Top Layer w10: J7.14 J21.14 2895,2825 2926,2856 3029.92,2856 U1.31
PA11: J7.13 J21.13 R6.2 S2.2 U1.32 | length 2113.8
  Top Layer w10: U1.32 2995,2793.24 J21.13 J7.13 3165,2370 v1(3230,2370)
  Bottom Layer w10: v1(3230,2370) 3335,2265 3840,2265 4015,2090 4197.01,2090 ; R6.2 4197.01,2090 ; S2.2 4425,2090 4197.01,2090
PA12: J7.12 J21.12 U1.33 | length 410.7
  Top Layer w10: J7.12 J21.12 3075.4,2735 3035,2775.4 3035,2805.4 U1.33
PA15: J7.11 J21.11 U1.38 | length 373.9
  Top Layer w10: J7.11 J21.11 3215,2735 3275,2795 3275,2819.73 U1.38
PB0: J6.13 J20.13 U1.18 U7.9 | length 1945.9
  Top Layer w10: U1.18 2985,3248.92 2985,3335 J20.13 J6.13 3275,3820 4235,3820 U7.9@4340,3925
PB1: J6.14 J20.14 U1.19 U7.15 | length 1476.3
  Top Layer w10: U1.19 2895,3311.08 J20.14 J6.14 3215,3860 3670,3860 U7.15@3735,3925
PB3: J7.10 J21.10 R18.2 R21.2 U1.39 U6.1 | length 1678.2
  Top Layer w10: R18.2 3092.99,1700 U6.1 3142.5,1707.5 3142.5,1742.5 3385,1985 3385,2172.99 R21.2 v1(3392.01,2330) ; U1.39 3295,2827.56 J21.10 J7.10
  Bottom Layer w10: J7.10 3295,2427.01 v1(3392.01,2330)
PB5: J7.8 J21.8 U1.41 | length 495.5
  Top Layer w10: U1.41 3393.24,2785 3480,2785 3495,2770 J21.8 J7.8
PB8: J7.5 J21.5 R7.1 T1.1 U1.45 | length 1756.3
  Top Layer w10: U1.45 3439.6,2850 3680,2850 J21.5 J7.5 v1(3795,2068.57)
  Bottom Layer w10: v1(3795,2068.57) 3811.43,2068.57 4080,1800 ; T1.1@4080,1743.78 4080,1800 ; R7.1 4080,1800
PB10: J6.15 J9.5 J20.15 U1.21 | length 3837.3
  Top Layer w10: J6.15 J20.15 2815.4,3335 U1.21 ; v1(4239,3485) 4320,3404 4320,2630 4535,2415 4535,1925 J9.5
  Bottom Layer w10: J6.15 2850,3485 v1(4239,3485)
PB11: J6.16 J9.7 J20.16 U1.22 | length 4211.6
  Top Layer w10: J6.16 J20.16 2750,3280 2842.56,3280 U1.22 ; v1(4365,3230) 4365,2755 4705,2415 4705,1695 J9.7
  Bottom Layer w10: J6.16 2780,3455 4140,3455 v1(4365,3230)
PB12: J7.20 J15.2 J21.20 U1.25 | length 1741.9
  Top Layer w10: J15.2 1980,3095 1980,2755 2000,2735 J21.20 ; J7.20 J21.20 ; U1.25 2981.89,2975 2535,2975 J21.20
PB13: J7.19 J19.2 J21.19 U1.26 | length 1375.8
  Top Layer w10: J19.2 2105,2450 2305,2450 J7.19 J21.19 2395,2780 2570,2955 2989.73,2955 U1.26
PB14: J7.18 J21.18 J22.2 U1.27 | length 1745.4
  Top Layer w10: J7.18 J21.18 2495,2835 2595,2935 2997.56,2935 U1.27
  Bottom Layer w10: J22.2@2040,1880 J22.2 2285,2135 2285,2330 J7.18
PB15: J7.17 J11.2 J21.17 U1.28 | length 1108.7
  Top Layer w10: J7.17 J21.17 2595,2865 2645,2915 3005.4,2915 U1.28
  Bottom Layer w10: J11.2 2510,2445 2595,2530 J7.17
PC13: J6.2 J8.5 J20.2 U1.2 | length 1508.9
  Top Layer w10: U1.2 3480.27,3195 3955,3195 J20.2 J6.2 4285,3730 J8.5
PC14: J6.3 J20.3 U1.3 U5.2 | length 1869.9
  Top Layer w10: U1.3 3470,3212.56 3872.56,3212.56 J20.3 J6.3 4185,3730 4230,3730 4320,3820 4645,3820 U5.2
PC15: J6.4 J20.4 U1.4 U5.3 | length 1778
  Top Layer w10: U1.4 3459.6,3230 3790,3230 J20.4 J6.4 4130,3775 4230,3775 4315,3860 4585,3860 U5.3
SOIL_IN2: R19.3 U6.2 | length 195.4
  Top Layer w10: U6.2 3235,1540 R19.3
SWCLK: J1.2 U1.37 | length 1015.6
  Top Layer w10: v1(3115,2795) 3180,2795 3225.7,2840.7 U1.37
  Bottom Layer w10: J1.2 2575,2895 3015,2895 v1(3115,2795)
SWIO: J1.3 U1.34 | length 895.8
  Top Layer w10: v1(3070,2800) 3065,2800 3075,2810 3075,2817.56 U1.34
  Bottom Layer w10: J1.3 2514,2856 3014,2856 v1(3070,2800)
VBAT: J6.1 J20.1 U1.1 | length 1132
  Top Layer w10: U1.1 3926.19,3066.19 J20.1 J6.1
pads on no net: J15.1 J19.1 J22.1 S2.3 T1.8 T1.9 T1.10 T1.11 T1.12 T1.13 T1.14 T1.15 U2.6 U3.4 U5.6 U5.7
copper on no net:
  other v2: 1280,1270 4765,1280 1280,4745 4780,4755

## Keep-outs
Keep-Out Layer:
  lines w10: 1097.01,4785.02 cw(c1244.68,4782.52) 1242.48,4930.2 ; 1097.82,1219.47 ccw(c1245.5,1221.67) 1243,1074 ; 1098.09,1210.79 1098.09,4801.91 ; 1242,1074 4814,1074 ; 1242.48,4930.12 4814.56,4930.12 ; 4804.52,1073.8 ccw(c4802.32,1221.48) 4949.99,1218.98 ; 4816.88,4930.1 cw(c4814.56,4792.6) 4952.06,4794.65 ; 4952.22,1222.21 4952.22,4794.6

## Silkscreen, mask and mechanical layers (free items; w line width, h text height)
Top Overlay:
  text "智慧农业--flying" at 3065,3705 h100
  text "智慧农业--flying" at 2720,2360 h100
Bottom Overlay:
  text "SDA" at 4395,3180 h30 r270
  text "SCL" at 4395,3080 h30 r270
  text "GND" at 4395,2975 h30 r270
  text "3.3" at 4395,2880 h30 r270
  text "智慧农业--flying" at 4715,2810 h100 r270

## Text inside footprints (layer, text, board x,y; h text height)
C2: Top Overlay "C3" at 1783.7,4202.61 h25
C5: Top Overlay "C3" at 3058.7,4412.61 h25
D1: Top Overlay "+" at 1440,3875 h50 r90
D2: Top Overlay "+" at 2795,3860 h50 r90
D3: Top Overlay "+" at 2585,1760 h50 r90
D4: Top Overlay "+" at 2645,1595 h50 r270
J2: Top Overlay "GND" at 2295,4770 h30; Top Overlay "GND" at 2390,4770 h30; Top Overlay "GND" at 2495,4770 h30; Top Overlay "GND" at 2590,4770 h30
J3: Top Overlay "GND" at 3025,4775 h30; Top Overlay "GND" at 2925,4775 h30; Top Overlay "GND" at 2825,4775 h30; Top Overlay "GND" at 2725,4775 h30
J4: Top Overlay "GND" at 2035,4775 h30; Top Overlay "GND" at 2140,4775 h30
J8: Top Overlay "ADDR" at 4360,3715 h30; Top Overlay "SDA" at 4370,3625 h30; Top Overlay "SCL" at 4370,3520 h30; Top Overlay "VCC" at 4370,3320 h30; Top Overlay "GND" at 4370,3420 h30
J9: Bottom Overlay "SDA" at 4700,2200 h30 r270; Bottom Overlay "SCK" at 4700,2100 h30 r270; Bottom Overlay "MOSI" at 4700,1995 h30 r270; Bottom Overlay "MISO" at 4700,1890 h30 r270; Bottom Overlay "IRQ" at 4700,1810 h30 r270; Bottom Overlay "GND" at 4700,1700 h30 r270; Bottom Overlay "RST" at 4700,1595 h30 r270; Bottom Overlay "VCC" at 4700,1495 h30 r270
U2: Top Overlay "LM2596S" at 2605,4045 h100 r180
U3: Top Overlay "UP1" at 3300,4625 h25
U5: Top Overlay "GND" at 4565,4220 h30 r90; Top Overlay "IO2" at 4675,4230 h30 r90; Top Overlay "IO0" at 4775,4230 h30 r90; Top Overlay "RX" at 4865,4230 h30 r90; Top Overlay "TX" at 4565,4140 h30 r90; Top Overlay "EN" at 4675,4140 h30 r90; Top Overlay "RST" at 4775,4130 h30 r90; Top Overlay "VCC" at 4865,4130 h30 r90
U7: Top Overlay "VCC" at 4210,4445 h50 r270; Top Overlay "VM" at 4290,4445 h50 r270; Top Overlay "GND" at 4110,4445 h50 r270; Top Overlay "AO1" at 4010,4445 h50 r270; Top Overlay "AO2" at 3910,4445 h50 r270; Top Overlay "BO2" at 3810,4445 h50 r270; Top Overlay "BO1" at 3710,4445 h50 r270; Top Overlay "GND" at 3630,4445 h50 r270; Top Overlay "PWMA" at 4290,4145 h50 r270; Top Overlay "AIN2" at 4210,4105 h50 r270; Top Overlay "AIN1" at 4110,4105 h50 r270; Top Overlay "STBY" at 4010,4125 h50 r270; Top Overlay "BIN1" at 3910,4105 h50 r270; Top Overlay "BIN2" at 3810,4105 h50 r270; Top Overlay "PWMB" at 3710,4125 h50 r270; Top Overlay "GND" at 3630,4105 h50 r270